# Altium PCB HV_Module.PCBDOC (part 2 of 2)
Units mm, origin at the board's own origin, x right, y up, seen from the top; angles counter-clockwise.
Board outline 118 x 86 mm, 4 copper layers (Top, GP1(GND), L3, Bot), stack 1.648 mm thick; 254 components, 171 nets, 762 pads, 0 vias.
Unrouted connection lines stored in the file: 464.
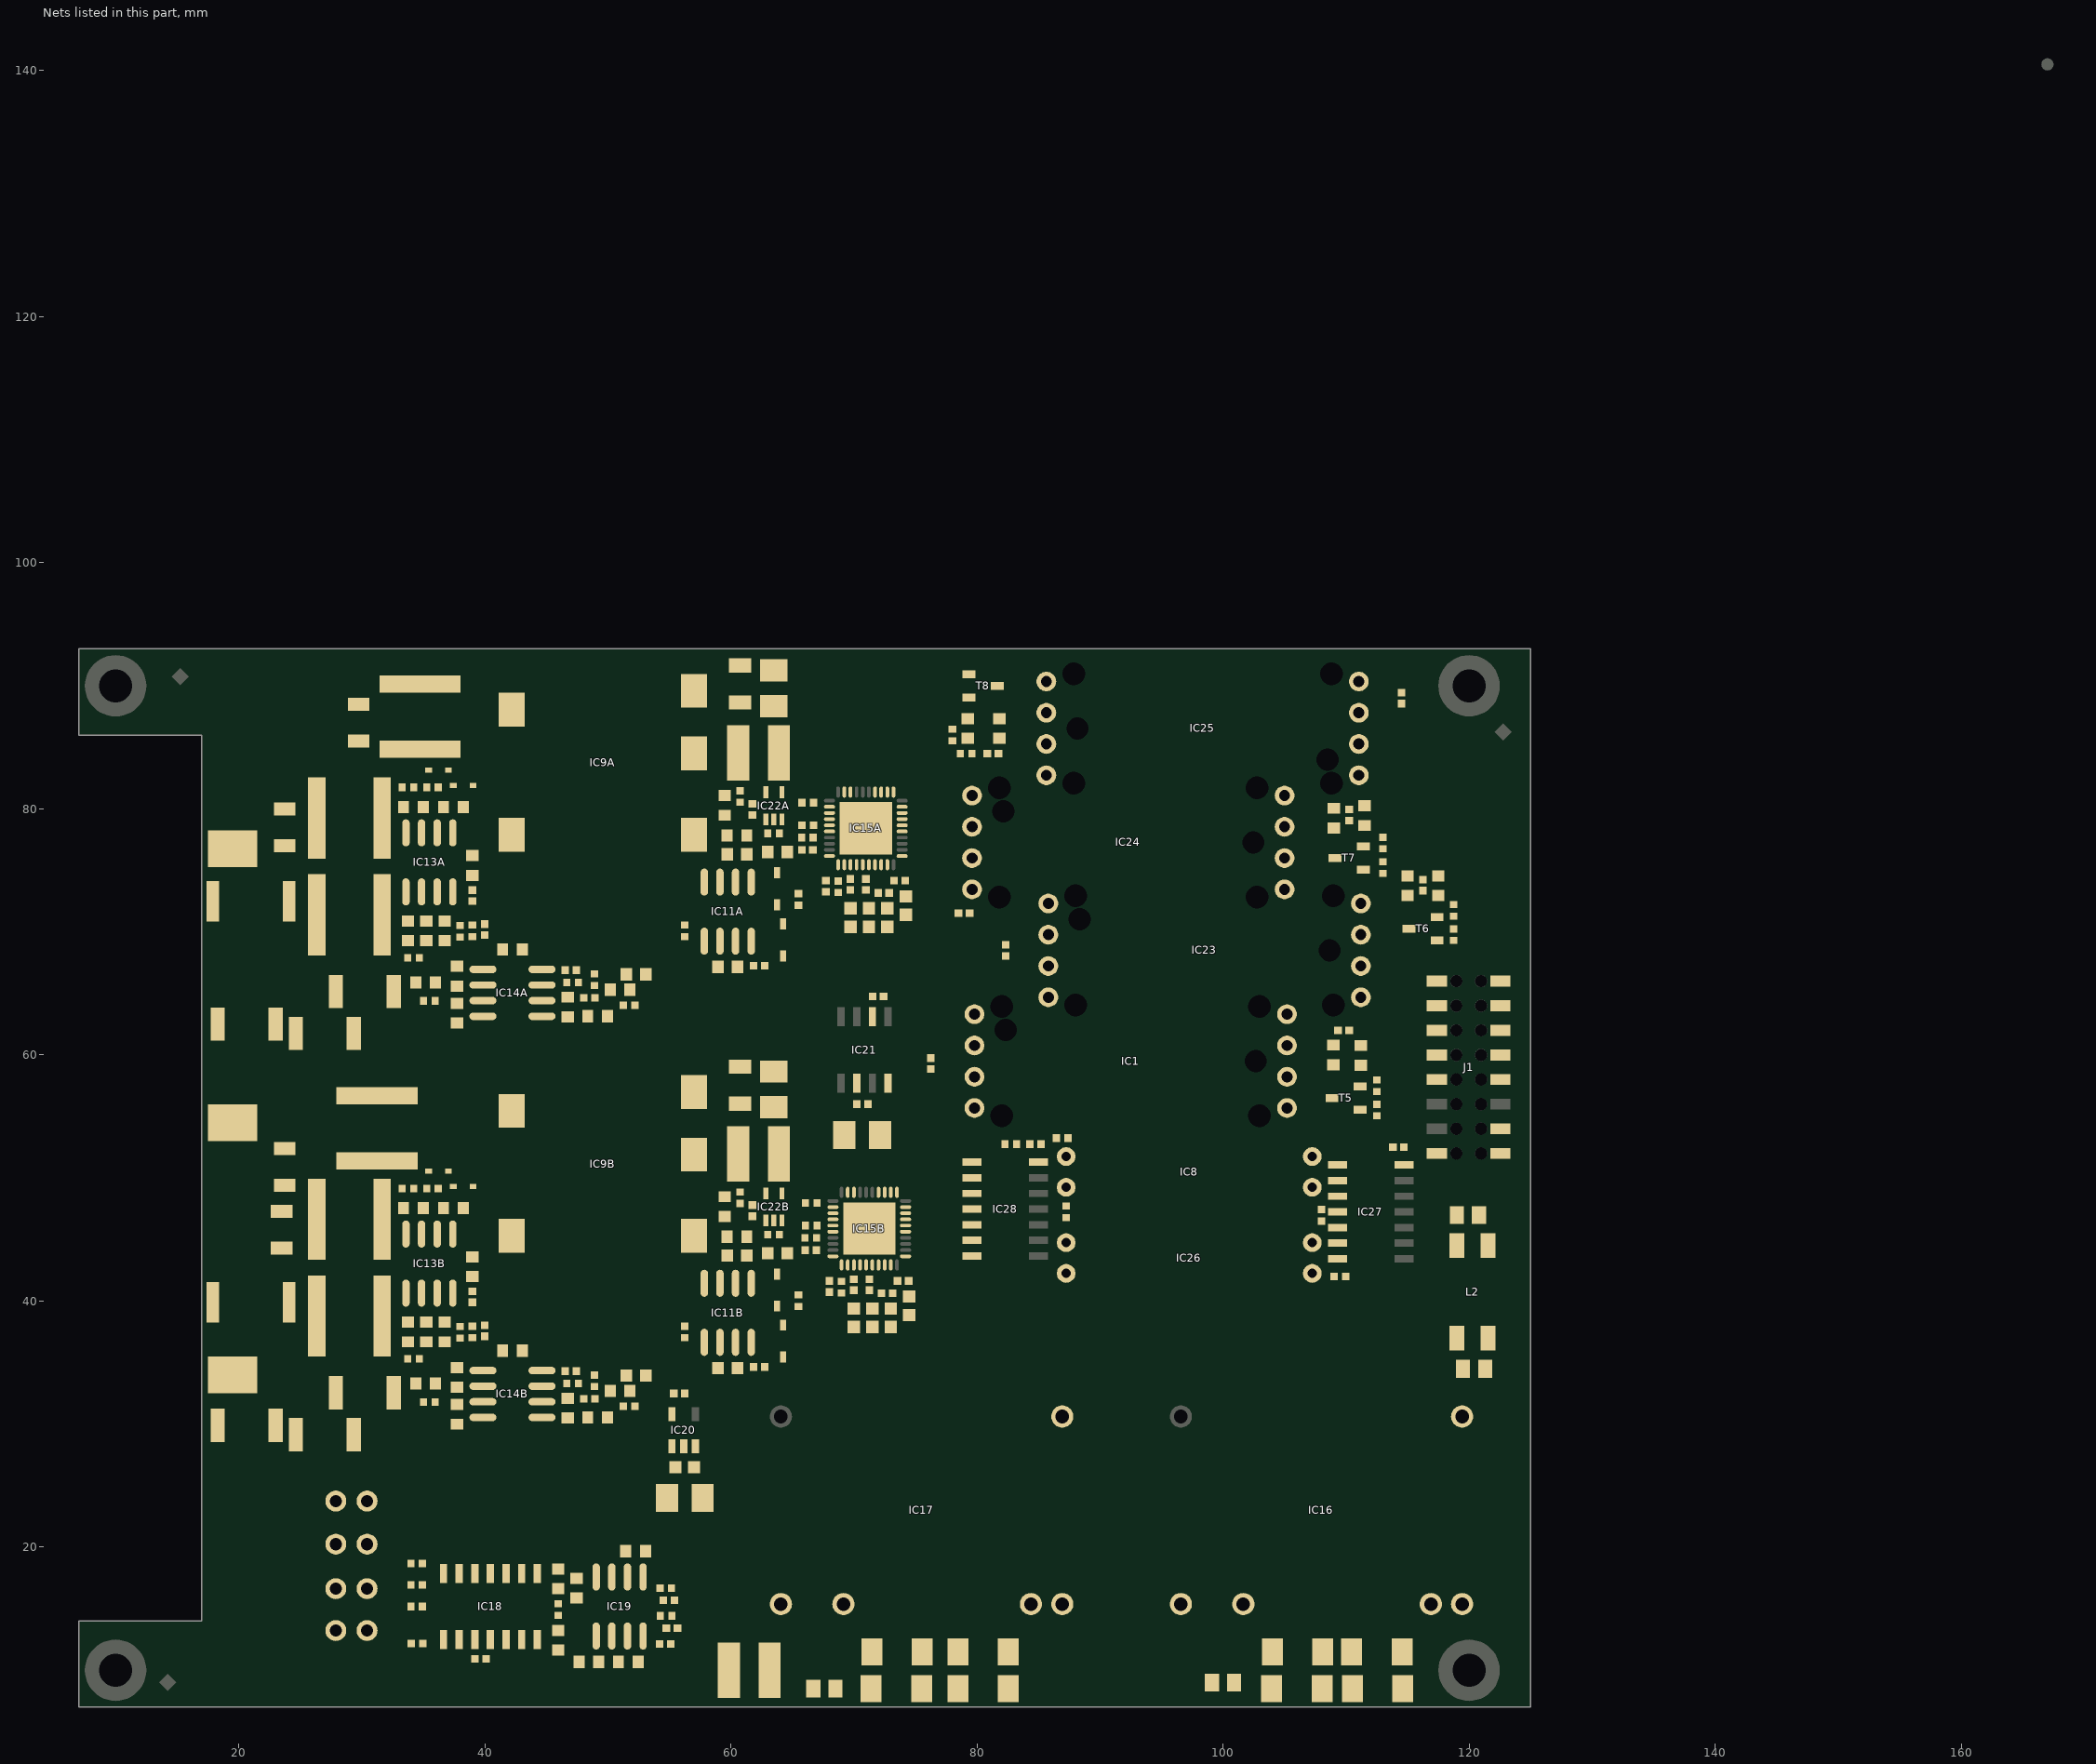
[diagram p3: the nets of this part, all layers, seen from the top]

## Part data
B1 B2 B3 B4: library part PLATED_HOLE2.7_PAD5.0, "Single Terminal Socket", Author="CERN DEM JMW", Component Type="Standard (No BOM)", ComponentHeight=0mm, CreateDate=27.09.2011, Family="Plated Hole", HelpURL=Undefined, LatestRevisionDate=27.09.2011, Mounted=No, PackageDescription="Plated Through Hole: Hole Dia.=2.7mm Pad Dia.=5.0mm", Part Description="Plated Through Hole: Hole Dia.=2.7mm Pad Dia.=5.0mm", Part Number=PLATED_HOLE2.7_PAD5.0, Pin Count=1, Sense=No, SMD=No, Socket=No, Status=None
C1 C2 C3 C5A C5B C6 C7 C12A C12B C13A C13B C44 C46 C49 C50 C51 C52 C57 C61 C62 C63: library part CC0402_1UF_16V_10%_X5R, "Non-polarised capacitor", Case=0402, Manufacturer=GENERIC, Manufacturer1 ComponentHeight=0.55mm, Manufacturer1 Example=TDK, Manufacturer1 Part Number=C1005X5R1C105KT, Tolerance=±10%, Voltage=16V, Author="CERN DEM JLC", Component Type=Standard, CreateDate=2012-10-25, HelpURL=\\cern.ch\dfs\Applications\Altium\Datasheets\CC0402_X5R_TDK_C.pdf, LatestRevisionDate=2012-10-25, Manufacturer Part Number=CC0402_1UF_16V_10%_X5R, Mounted=Yes, Part Description="SMD Multilayer Chip Ceramic Capacitor", Part Number=CC0402_1UF_16V_10%_X5R, Pin Count=2, Sense=No, SMD=Yes, Socket=No, Status=Preferred, TC=X5R
C4A C4B: library part CC1206_22UF_25V_20%_X5R, "Non-polarised capacitor", Case=1206, Manufacturer=GENERIC, Manufacturer1 ComponentHeight=1.8mm, Manufacturer1 Example=TDK, Manufacturer1 Part Number=C3216X5R1E226M160AB, Tolerance=±20%, Voltage=25V, Author="CERN DEM WB", Component Type=Standard, CreateDate=25/07/2018, HelpURL=\\cern.ch\dfs\Applications\Altium\Datasheets\CC1206_X5R_TDK_C.pdf, LatestRevisionDate=25/07/2018, Manufacturer Part Number=CC1206_22UF_25V_20%_X5R, Mounted=Yes, Part Description="SMD Multilayer Chip Ceramic Capacitor", Part Number=CC1206_22UF_25V_20%_X5R, Pin Count=2, Sense=No, SMD=Yes, Socket=No, Status=None, TC=X5R
C11A C11B C16A C16B C23A C23B: library part CC0402_10NF_25V_10%_X7R, "Non-polarised capacitor", Case=0402, Manufacturer=GENERIC, Manufacturer1 ComponentHeight=0.55mm, Manufacturer1 Example=TDK, Manufacturer1 Part Number=C1005X7R1E103K050, Tolerance=±10%, Voltage=25V, Author="CERN DEM JLC", Component Type=Standard, CreateDate=25.10.2012, HelpURL=\\cern.ch\dfs\Applications\Altium\Datasheets\CC0402_X7R_TDK_C.pdf, LatestRevisionDate=25.10.2012, Manufacturer Part Number=CC0402_10NF_25V_10%_X7R, Mounted=Yes, Part Description="SMD Multilayer Chip Ceramic Capacitor", Part Number=CC0402_10NF_25V_10%_X7R, Pin Count=2, Sense=No, SMD=Yes, Socket=No, Status=Preferred, TC=X7R
C14A C14B C15A C15B C17A C17B C19A C19B C47: library part CC0603_10UF_16V_20%_X5R, "Non-polarised capacitor", Case=0603, Manufacturer=GENERIC, Manufacturer1 ComponentHeight=0.8mm, Manufacturer1 Example=MURATA, Manufacturer1 Part Number=GRM188R61C106MA73D, Tolerance=±20%, Voltage=16V, Author="CERN DEM MR", Component Type=Standard, CreateDate=02.03.2016, HelpURL=\\cern.ch\dfs\Applications\Altium\Datasheets\CC0603_X5R_MURATA_GRM.pdf, LatestRevisionDate=02.03.2016, Manufacturer Part Number=CC0603_10UF_16V_20%_X5R, Mounted=Yes, Part Description="SMD Multilayer Chip Ceramic Capacitor", Part Number=CC0603_10UF_16V_20%_X5R, Pin Count=2, Sense=No, SMD=Yes, Socket=No, Status=None, TC=X5R
C18A C18B C24A C24B: library part CC0402_100NF_16V_10%_X5R, "Non-polarised capacitor", Case=0402, Manufacturer=GENERIC, Manufacturer1 ComponentHeight=0.55mm, Manufacturer1 Example=MURATA, Manufacturer1 Part Number=GRM155R61C104KA88D, Tolerance=±10%, Voltage=16V, Author="CERN DEM JLC", Component Type=Standard, CreateDate=10.12.2013, HelpURL=\\cern.ch\dfs\Applications\Altium\Datasheets\CC0402_X5R_MURATA_GRM.pdf, LatestRevisionDate=10.12.2013, Manufacturer Part Number=CC0402_100NF_16V_10%_X5R, Mounted=Yes, Part Description="SMD Multilayer Chip Ceramic Capacitor", Part Number=CC0402_100NF_16V_10%_X5R, Pin Count=2, Sense=No, SMD=Yes, Socket=No, Status=None, TC=X5R
C20A C20B C30A C30B: library part CC0603_220NF_10V_10%_X7R, "Non-polarised capacitor", Case=0603, Manufacturer=GENERIC, Manufacturer1 ComponentHeight=0.9mm, Manufacturer1 Example="YAGEO PHYCOMP", Manufacturer1 Part Number="223824615654 or CC0603KRX7R6BB224", Tolerance=±10%, Voltage=10V, Author="CERN DEM JLC", Component Type=Standard, CreateDate=2012-10-25, HelpURL=\\cern.ch\dfs\Applications\Altium\Datasheets\CC0603_X7R_PHYCOMP.pdf, LatestRevisionDate=2012-10-25, Manufacturer Part Number=CC0603_220NF_10V_10%_X7R, Mounted=Yes, Part Description="SMD Multilayer Chip Ceramic Capacitor", Part Number=CC0603_220NF_10V_10%_X7R, Pin Count=2, Sense=No, SMD=Yes, Socket=No, Status=Preferred, TC=X7R
C21A C21B C22A C22B C29A C29B C48A C48B C54 C55: library part CC0402_100NF_16V_10%_X7R, "Non-polarised capacitor", Case=0402, Manufacturer=GENERIC, Manufacturer1 ComponentHeight=0.55mm, Manufacturer1 Example=MURATA, Manufacturer1 Part Number=GRM155R71C104KA88D, Tolerance=±10%, Voltage=16V, Author="CERN DEM JLC", Component Type=Standard, HelpURL=\\cern.ch\dfs\Applications\Altium\Datasheets\CC0402_X7R_MURATA_GRM.pdf, Manufacturer Part Number=CC0402_100NF_16V_10%_X7R, Mounted=Yes, Part Description="SMD Multilayer Chip Ceramic Capacitor", Part Number=CC0402_100NF_16V_10%_X7R, Pin Count=2, Sense=No, SMD=Yes, Socket=No, Status="Not Recommended", TC=X7R
  C21A C21B C22A C22B: CreateDate=2013-12-05, LatestRevisionDate=2007-12-03
  C29A C29B C48A C48B C54 C55: CreateDate=05.12.2013, LatestRevisionDate=03.12.2007
C25A C25B C27A C27B C28A C28B: library part CC2225_33NF_2KV_10%_X7R, "Non-polarised capacitor", Case=2225, Manufacturer=GENERIC, Manufacturer1 ComponentHeight=2.54mm, Manufacturer1 Example=AVX, Manufacturer1 Part Number=2225GC333KAT1A, Tolerance=±10%, Voltage=2KV, Author="CERN DEM JMW", Component Type=Standard, CreateDate=13.07.2015, HelpURL=\\cern.ch\dfs\Applications\Altium\Datasheets\CC2225_X7R_AVX_HV-MLC.pdf, LatestRevisionDate=13.07.2015, Manufacturer Part Number=CC2225_33NF_2KV_10%_X7R, Mounted=Yes, Part Description="High Voltage MLC Chip Capacitor", Part Number=CC2225_33NF_2KV_10%_X7R, Pin Count=2, Sense=No, SMD=Yes, Socket=No, Status=None, TC=X7R
C26A C26B C53 C56: library part CTE3528-21_22UF_20V_10%, "Polarised capacitor", Case=B, Manufacturer=GENERIC, Manufacturer1 ComponentHeight=2.1mm, Manufacturer1 Example=AVX, Manufacturer1 Part Number=TAJB226K020R, Tolerance=±10%, Voltage=20V, Author="CERN DEM JLC", Component Type=Standard, CreateDate=03/12/2007, HelpURL=\\cern.ch\dfs\Applications\Altium\Datasheets\CTE_AVX_TAJ.pdf, LatestRevisionDate=03/12/2007, Manufacturer Part Number=CTE3528-21_22UF_20V_10%, Mounted=Yes, Part Description="Solid Tantalum Chip Capacitor", Part Number=CTE3528-21_22UF_20V_10%, Pin Count=2, Sense=No, SMD=Yes, Socket=No, Status=Preferred
C31A C31B C45A C45B: library part CC0603_10NF_50V_5%_C0G, "Non-polarised capacitor", Case=0603, Manufacturer=GENERIC, Manufacturer1 ComponentHeight=0.9mm, Manufacturer1 Example=TDK, Manufacturer1 Part Number=C1608C0G1H103J080AA, Tolerance=±5%, Voltage=50V, Author="CERN DEM JLC", Component Type=Standard, CreateDate=2014-12-10, HelpURL=\\cern.ch\dfs\Applications\Altium\Datasheets\CC0603_C0G_TDK_C.pdf, LatestRevisionDate=2014-12-10, Manufacturer Part Number=CC0603_10NF_50V_5%_C0G, Mounted=Yes, Part Description="SMD Multilayer Chip Ceramic Capacitor", Part Number=CC0603_10NF_50V_5%_C0G, Pin Count=2, Sense=No, SMD=Yes, Socket=No, Status=Preferred, TC=C0G/NP0
C32 C33 C34 C35 C40 C41 C42 C43: library part CC1808_330pF_6000V_10%_X7R_VISHAY_HV, "Non-polarised capacitor", Case=1808, Manufacturer=VISHAY, Manufacturer Part Number=HV1808Y331KX6ATHV, Tolerance=±10%, Voltage=6000V, Author="CERN DEM HF", Component Type=Standard, ComponentHeight=2.7mm, CreateDate=11.02.2022, HelpURL=\\cern.ch\dfs\Applications\Altium\Datasheets\CC1812_VISHAY_HV.pdf, LatestRevisionDate=11.02.2022, Mounted=Yes, Part Description="SMD Multilayer Ceramic Chip Capacitor Solutions for High Voltage Applications", Part Number=CC1808_330pF_6000V_10%_X7R_VISHAY_HV, Pin Count=2, Sense=No, SMD=Yes, Socket=No, Status=None, TC=X7R
C36 C37 C38 C39: library part CC0805_4.7UF_50V_10%_X7R, "Non-polarised capacitor", Case=0805, Manufacturer=GENERIC, Manufacturer1 ComponentHeight=1.45mm, Manufacturer1 Example=TDK, Manufacturer1 Part Number=C2012X7R1H475K125, Tolerance=±10%, Voltage=50V, Author="CERN DEM JMW", Component Type=Standard, CreateDate=30.07.2021, HelpURL=\\cern.ch\dfs\Applications\Altium\Datasheets\CC0805_X7R_TDK_C.pdf, LatestRevisionDate=30.07.2021, Manufacturer Part Number=CC0805_4.7UF_50V_10%_X7R, Mounted=Yes, Part Description="SMD Multilayer Chip Ceramic Capacitor", Part Number=CC0805_4.7UF_50V_10%_X7R, Pin Count=2, Sense=No, SMD=Yes, Socket=No, Status=Preferred, TC=X7R
D1A D1B D9A D9B: "Transient Voltage Suppressor Diode (Uni-Directional)", Case=SOD-523, Manufacturer="VISHAY SEMICONDUCTORS", Power=100W, Voltage=1V, Author="CERN DEM BC", Bonding=No, Component Type=Standard, ComponentHeight=0.7mm, CreateDate=19.05.2020, Device=VESD01C1-02VHG3, HelpURL=\\cern.ch\dfs\Applications\Altium\Datasheets\VESD01C1-02VHG3.pdf, LatestRevisionDate=19.05.2020, Manufacturer Part Number=VESD01C1-02VHG3, Mounted=Yes, PackageDescription="SODFL (SOD-523) Diode; 1.20mm W X 0.80mm L X 0.70mm H body, IPC Medium Density", Part Description="Single-Line ESD-Protection (30kV) Diode", Part Number=VESD01C1-02VHG3, Pin Count=2, PressFit=No, Sense=No, SMD=Yes, Socket=No
D3A D3B D8A D8B: "Schottky Diode", Case=SOD-323, Manufacturer=INFINEON, Power=750mA, Voltage=40V, Author="CERN DEM JLC", Bonding=No, Component Type=Standard, ComponentHeight=1.1mm, CreateDate=12.11.2014, Device=BAT165, HelpURL=\\cern.ch\dfs\Applications\Altium\Datasheets\BAT165.pdf, LatestRevisionDate=12.11.2014, Manufacturer Part Number=BAT165, Mounted=Yes, PackageDescription="Small Outline Diode (SOD-323), 1.70mm W X 1.25mm L X 1.10mm H body,  IPC Medium Density", Part Description="Medium Power AF Schottky Diode", Part Number=BAT165, Pin Count=2, PressFit=No, Sense=No, SMD=Yes, Socket=No
FTG1: library part FIDUCIAL_TARGET_C100-200, "Fiducial Target", Author="CERN DEM JLC", Component Type="Standard (No BOM)", ComponentHeight=0mm, CreateDate=09.02.2010, Family=Fiducial, HelpURL=Undefined, LatestRevisionDate=04.04.2012, Mounted=No, PackageDescription="Round Fiducial Target, Top Layer, 1.0mm, Top Solder 2.0mm, Keepout =2.0mm", Part Description="Round Fiducial Target, Top Layer, 1.0mm, Top Solder 2.0mm, Keepout =2.0mm", Part Number=FIDUCIAL_TARGET_C100-200, Pin Count=1, Sense=No, SMD=Yes, Socket=No, Status=None
FTG2 FTG3 FTG4: library part FIDUCIAL_TARGET_S100-200, "Fiducial Target", Author="CERN DEM JLC", Component Type="Standard (No BOM)", ComponentHeight=0mm, CreateDate=09.02.2010, Family=Fiducial, HelpURL=Undefined, LatestRevisionDate=04.04.2012, Mounted=No, PackageDescription="Square Fiducial Target, Top Layer, 1.0mm, Top Solder 2.0mm, Keepout =2.0mm", Part Description="Square Fiducial Target, Top Layer, 1.0mm, Top Solder 2.0mm, Keepout =2.0mm", Part Number=FIDUCIAL_TARGET_S100-200, Pin Count=1, Sense=No, SMD=Yes, Socket=No, Status=None
IC1 IC23 IC24 IC25: "High Voltage Galvanic Insulation Link for DC to 5MBaud", Manufacturer=BROADCOM, Author="CERN DEM HF", Bonding=No, Component Type=Standard, ComponentHeight=6.7mm, CreateDate=10.02.2022, Device=AFBR-390525RZ, HelpURL=\\cern.ch\dfs\Applications\Altium\Datasheets\AFBR-390525RZ.pdf, LatestRevisionDate=10.02.2022, Manufacturer Part Number=AFBR-390525RZ, Mounted=Yes, PackageDescription="BROADCOM AFBR-390525RZ Case, Body 30.46mm L X 10.16mm W X 6.7mm H", Part Description="High Voltage Galvanic Insulation Link for DC to 5MBaud, Length 25mm, 15kV Voltage Supperssion", Part Number=AFBR-390525RZ, Pin Count=8, PressFit=No, Sense=No, SMD=No, Socket=No
IC8 IC26: library part OPTO-OPI1264C, "10kV opto-coupler", Supplier Part Number 1=08F2863, Supplier 1=Newark
IC9A IC9B: "XP POWER, AG Series, DC/HVDC Converter", Manufacturer="XP POWER", Author="CERN DEM BC", Bonding=No, Component Type=Standard, ComponentHeight=3.3mm, CreateDate=18.09.2020, Device=AG20P-5, HelpURL=\\cern.ch\dfs\Applications\Altium\Datasheets\XPPOWER_AG-Series.pdf, LatestRevisionDate=18.09.2020, Manufacturer Part Number=AG20P-5, Mounted=Yes, PackageDescription="AG Series, DC/HVDC Converter, Body W 11.43mm x L 23.37mm x H 6.35mm", Part Description="5VDC to 0-2kVDC, Iout (max) 0.5mA, 1W DC-HVDC Converter", Part Number=AG20P-5, Pin Count=5, PressFit=No, Sense=No, SMD=Yes, Socket=No
IC11A IC11B IC13A IC13B IC14A IC14B IC19: library part CMP-0384-00615-1, "Double Channel Wide Bandwidth Operational Amplifier, 24 MHz BW, 12 V/us SR, Industrial, 8-pin SOIC (R-8), Tube", Amplifiers Per Package=2, Generic Part Number=AD8616, Input Bias Current=200fA, Input Offset Voltage=23uV, Manufacturer="Analog Devices", Code_JEDEC=MS-012-AA, ComponentLink1Description="Manufacturer URL", ComponentLink1URL=http://www.analog.com/en/index.html, ComponentLink2Description=Datasheet, ComponentLink2URL=http://www.analog.com/static/imported-files/data_sheets/AD8615_8616_8618.pdf, ComponentLink3Description="Package Specification", ComponentLink3URL=http://www.analog.com/static/imported-files/packages/PKG_PDF/SOIC_Narrow%20(R)/R_8.pdf, DatasheetVersion="Rev. E", Iq/Amp=2mA, Mounting Technology="Surface Mount", PackageDescription="8-Pin Standard Small Outline Package, Body 3.9 x 4.9 mm, Pitch 1.27 mm", PackageReference=R-8, PackageVersion=060506-A, PartNumber=AD8616AR, Slew Rate=12V/us, Small Signal Bandwidth=24MHz, V Span Max=6V, V Span Min=2.7V
IC15A IC15B: "12-/16-Bit DAS with ADC, DACs, DPIOs, APIOs, Reference, Voltage Monitors, and Temp Sensor", Case=QFN40, Manufacturer=MAXIM, Author="CERN DEM HF", Bonding=No, Component Type=Standard, ComponentHeight=0.8mm, CreateDate=09.02.2022, Device=MAX1329BETL+, HelpURL=\\cern.ch\dfs\Applications\Altium\Datasheets\MAX1329BETL+.pdf, LatestRevisionDate=09.02.2022, Manufacturer Part Number=MAX1329BETL+, Mounted=Yes, PackageDescription="QFN, 0.50mm Pitch, Square; 40 Pin, 6.00mm L X 6.00mm W X 0.80mm H body (w/Thermal Tab 4.25 X 4.25mm), IPC Medium Density", Part Description="12-/16-Bit DAS with ADC, DACs, DPIOs, APIOs, Reference, Voltage Monitors, and Temp Sensor", Part Number=MAX1329BETL+, Pin Count=41, PressFit=No, Sense=No, SMD=Yes, Socket=No
IC16 IC17: "RECOM, RP Series, Single Output DCDC Converter", Manufacturer=RECOM, Author="CERN DEM HF", Bonding=No, Component Type=Standard, ComponentHeight=10.2mm, CreateDate=08.02.2022, HelpURL=\\cern.ch\dfs\Applications\Altium\Datasheets\RECOM_REM5E-XXXXS.pdf, LatestRevisionDate=08.02.2022, Mounted=Yes, PackageDescription="REM5E-XXXXS Series, Body 31.8x20.3mm, DIP-24 Package", Pin Count=6, PressFit=No, Sense=No, SMD=No, Socket=No
  IC16: Device=REM5E-1205S/R10/A, Manufacturer Part Number=REM5E-1205S/R10/A, Part Description="12VDC to +5V (+1A), 5W Regulated DC-DC Converter", Part Number=REM5E-1205S/R10/A
  IC17: Device=REM5E-0505S/R10/A, Manufacturer Part Number=REM5E-0505S/R10/A, Part Description="5VDC to +5V (+1A), 5W Regulated DC-DC Converter", Part Number=REM5E-0505S/R10/A
IC18: "Quad Operational Amplifier", Case=SOIC14, Manufacturer="TEXAS INSTRUMENTS", Author="CERN DEM MR", Bonding=No, Component Type=Standard, ComponentHeight=1.75mm, CreateDate=23.03.2016, Device=LP339M/NOPB, HelpURL=\\cern.ch\dfs\Applications\Altium\Datasheets\LP339M-NOPB.pdf, LatestRevisionDate=23.03.2016, Manufacturer Part Number=LP339M/NOPB, Mounted=Yes, PackageDescription="SOIC 14, Pitch 1.27mm - Body 4x8.75mm, IPC Medium Density", Part Description="Ultra-Low Power Quad Comparator", Part Number=LP339M/NOPB, Pin Count=14, PressFit=No, Sense=No, SMD=Yes, Socket=No
IC20: "3.3V 300mA, Ultra-Low Quiescent Current, IQ 12uA, Ultra-Low Noise, LDO Voltage Regulator", Case=SOT23-5, Manufacturer="ON SEMICONDUCTOR", Author="CERN DEM JLC", Bonding=No, Component Type=Standard, ComponentHeight=1.1mm, CreateDate=16.02.2017, Device=NCP703SN33T1G, HelpURL=\\cern.ch\dfs\Applications\Altium\Datasheets\NCP703SN33T1G.pdf, LatestRevisionDate=16.02.2017, Manufacturer Part Number=NCP703SN33T1G, Mounted=Yes, PackageDescription="SOT, 0.95mm Pitch; 5 Pin, 1.50mm W X 3.00mm L X 1.10mm H Body, IPC Medium Density", Part Description="3.3V 300mA, Ultra-Low Quiescent Current, IQ 12uA, Ultra-Low Noise, LDO Voltage Regulator", Part Number=NCP703SN33T1G, Pin Count=5, PressFit=No, Sense=No, SMD=Yes, Socket=No
IC21: "2.5V ±0.12% 10ppm/°C Ultralow Noise XFET Voltage References with Current Sink and Source Capability", Case=SOIC8, Manufacturer="ANALOG DEVICES", Author="CERN DEM JLC", Bonding=No, Component Type=Standard, ComponentHeight=1.75mm, CreateDate=26.08.2013, Device=ADR431ARZ, HelpURL=\\cern.ch\dfs\Applications\Altium\Datasheets\ADR431ARZ.pdf, LatestRevisionDate=26.08.2013, Manufacturer Part Number=ADR431ARZ, Mounted=Yes, PackageDescription="SOIC 8, Pitch 1.27mm, Body 4x5mm, IPC Medium Density", Part Description="2.5V Output,  3mV ±0.12% Accuracy, 10ppm/°C Ultralow Noise XFET Voltage References with Current Sink and Source Capability", Part Number=ADR431ARZ, Pin Count=6, PressFit=No, Sense=No, SMD=Yes, Socket=No
IC22A IC22B: "Single Bus Buffer Gate With 3-State Output", Case=SOT353, Manufacturer=NEXPERIA, Author="CERN DEM JMW", Bonding=No, Component Type=Standard, ComponentHeight=1.1mm, CreateDate=06.08.2020, Device=74HCT1G125GW, HelpURL=\\cern.ch\dfs\Applications\Altium\Datasheets\74HCT1G125GW.pdf, LatestRevisionDate=06.08.2020, Manufacturer Part Number=74HCT1G125GW, Mounted=Yes, PackageDescription="SOT353, SC70-5, 0.65mm Pitch; 5 Pin, 1.25mm W X 2.00mm L X 1.10mm H body, IPC Medium Density", Part Description="Bus Buffer/Line Driver 3-State", Part Number=74HCT1G125GW, Pin Count=5, PressFit=No, Sense=No, SMD=Yes, Socket=No
IC27 IC28: "Hex Schmitt-Trigger Inverter", Case=SOIC14, Manufacturer="TEXAS INSTRUMENTS", Author="CERN DEM JMW", Bonding=No, Component Type=Standard, ComponentHeight=1.75mm, CreateDate=29.09.2008, Device=SN74LVC14AD, HelpURL=\\cern.ch\dfs\Applications\Altium\Datasheets\SN74LVC14AD.pdf, LatestRevisionDate=29.09.2008, Manufacturer Part Number=SN74LVC14AD, Mounted=Yes, PackageDescription="SOIC 14, Pitch 1.27mm - Body 4x8.75mm, IPC Medium Density", Part Description="Hex Schmitt-Trigger Inverter", Part Number=SN74LVC14AD, Pin Count=14, PressFit=No, Sense=No, SMD=Yes, Socket=No
J1: library part 62131621821, "Socket Header WR-PHD, Pitch 2.00 mm, SMT, Vertical, dual row, 16 pin", Contact Resistance="20 mOhm", Insulation Resistance=">1000 MOhm", Operating Temperature="-40 to 105 degC", Rated Current="2 A", Working Voltage="200 VAC", ComponentLink1Description=Manufacturer, ComponentLink1URL=http://www.we-online.de, ComponentLink2Description=Datasheet, ComponentLink2URL=http://katalog.we-online.com/em/datasheet/62131621821.pdf, Mounting Technology=SMT, Orientation=Vertical, Part Number=62131621821, Pin Number=16, Pitch="2.00 mm", Published Date="Jan. 2018", Publisher="Wurth Elektronik", Row Number=dual
J3 J4 J7: library part SMD_PAD_4X3MM, "Single SMD Pad", Author="CERN DEM JLC", Component Type="Standard (No BOM)", ComponentHeight=0mm, CreateDate=15.03.2010, Family="SMD Pad", HelpURL=Undefined, LatestRevisionDate=15.03.2010, Mounted=No, PackageDescription="4mm x  3mm SMD Pad", Part Description="4mm x 3mm SMD Pad", Part Number=SMD_PAD_4X3MM, Pin Count=1, Sense=No, SMD=No, Socket=No, Status=None
L1A L1B L3: library part IND_10UH_20%_BOURNS_PM43, "Inductor With Core", Manufacturer=BOURNS, Manufacturer Part Number=PM43-100M-RC, Power=1.15A, Resistance=0.18R, Tolerance=±20%, Author="CERN DEM JLC", Component Type=Standard, ComponentHeight=3.5mm, CreateDate=17/05/2011, HelpURL=\\cern.ch\dfs\Applications\Altium\Datasheets\IND_BOURNS_PM43.pdf, LatestRevisionDate=17/05/2011, Mounted=Yes, Part Description="SMD Power Inductor", Part Number=IND_10UH_20%_BOURNS_PM43, Pin Count=2, Sense=No, SMD=Yes, Socket=No, Status=None
L2: library part IND_250UH_50%_WURTH_WE-SL2-744224, "Inductor Common Mode", Manufacturer="WURTH ELEKTRONIK", Manufacturer Part Number=744224, Power=1.2A, Resistance=0.13R, Tolerance=±50%, Author="CERN DEM JLC", Component Type=Standard, ComponentHeight=5.3mm, CreateDate=02.12.2009, HelpURL=\\cern.ch\dfs\Applications\Altium\Datasheets\IND_WURTH_WE-SL2_744224.pdf, LatestRevisionDate=15.10.2012, Mounted=Yes, Part Description="Common Mode SMD Line Filter (WE-SL2 Series)", Part Number=IND_250UH_50%_WURTH_WE-SL2-744224, Pin Count=4, Sense=No, SMD=Yes, Socket=No
LD1 LD3: library part LED_DIALIGHT_555-2301F, "LED Green 1C 2A", Manufacturer=DIALIGHT, Manufacturer Part Number=555-2301F, Author="CERN DEM JMW", Bonding=No, Color=Green, Component Type=Standard, ComponentHeight=6.35mm, CreateDate=22.09.2008, HelpURL=\\cern.ch\dfs\Applications\Altium\Datasheets\LED_DIALIGHT_555-2301F.pdf, LatestRevisionDate=17.03.2010, Mounted=Yes, PackageDescription="Single 2mm Green LED, Body 5.08x2.54mm, Pin spacing 2.54mm", Part Description="Single 2mm Green LED CBI® Circuit Board Indicator", Part Number=LED_DIALIGHT_555-2301F, Pin Count=2, PressFit=No, Sense=No, SMD=No, Socket=No
LD2 LD4: library part LED_DIALIGHT_555-2001F, "LED Red 1C 2A", Manufacturer=DIALIGHT, Manufacturer Part Number=555-2001F, Author="CERN DEM JMW", Bonding=No, Color=Red, Component Type=Standard, ComponentHeight=6.35mm, CreateDate=22.09.2008, HelpURL=\\cern.ch\dfs\Applications\Altium\Datasheets\LED_DIALIGHT_555-2001F.pdf, LatestRevisionDate=17.03.2010, Mounted=Yes, PackageDescription="Single 2mm Red LED, Body 5.08x2.54mm, Pin spacing 2.54mm", Part Description="Single 2mm Red LED CBI® Circuit Board Indicator", Part Number=LED_DIALIGHT_555-2001F, Pin Count=2, PressFit=No, Sense=No, SMD=No, Socket=No
LP1 LP2 LP3 LP4: library part LEDLP_BIVAR_PLP2-1200, "LED Light Pipe x1 Type1", Manufacturer=BIVAR, Manufacturer Part Number=PLP2-1200, Author="CERN DEM HF", Bonding=No, Component Type=Standard, ComponentHeight=31.3mm, CreateDate=09.02.2022, HelpURL=\\cern.ch\dfs\Applications\Altium\Datasheets\LEDLP_BIVAR_PLP2-1200.pdf, LatestRevisionDate=09.02.2022, Mounted=Yes, PackageDescription="3mm Dome Leens, Single Station Vertivcal Round Lightpipe Height 1.2 in. (30.5mm)", Part Description="3mm Dome Leens, Single Station Vertivcal Round Lightpipe Height 1.2 in. (30.5mm)", Part Number=LEDLP_BIVAR_PLP2-1200, Pin Count=0, PressFit=No, Sense=No, SMD=No, Socket=No
R1 R6 R98 R102: library part R0603_390R_1%_0.1W_100PPM, "Resistor - 1%", Case=0603, Manufacturer=GENERIC, Manufacturer1 ComponentHeight=0.55mm, Manufacturer1 Example="NIC COMPONENT", Manufacturer1 Part Number=NRC06F3900TRF, Power=0.1W, Tolerance=±1%, Author="CERN DEM JLC", Component Type=Standard, CreateDate=03.12.2007, HelpURL=\\cern.ch\dfs\Applications\Altium\Datasheets\R0603_NIC_NRC.pdf, LatestRevisionDate=13.03.2008, Manufacturer Part Number=R0603_390R_1%_0.1W_100PPM, Mounted=Yes, Part Description="General Purpose Thick Film Chip Resistor", Part Number=R0603_390R_1%_0.1W_100PPM, Pin Count=2, PressFit=No, Sense=No, SMD=Yes, Socket=No, Status=Preferred, TC=±100ppm/°C
R2 R95 R99 R103: library part R0402_47R_1%_0.0625W_100PPM, "Resistor - 1%", Case=0402, Manufacturer=GENERIC, Manufacturer1 ComponentHeight=0.4mm, Manufacturer1 Example="YAGEO PHYCOMP", Manufacturer1 Part Number=232270674709L, Power=0.0625W, Tolerance=±1%, Author="CERN DEM JLC", Component Type=Standard, CreateDate=03.12.2007, HelpURL=\\cern.ch\dfs\Applications\Altium\Datasheets\R0402_Phycomp_RC0402.pdf, LatestRevisionDate=17.10.2012, Manufacturer Part Number=R0402_47R_1%_0.0625W_100PPM, Mounted=Yes, Part Description="General Purpose Thick Film Chip Resistor", Part Number=R0402_47R_1%_0.0625W_100PPM, Pin Count=2, PressFit=No, Sense=No, SMD=Yes, Socket=No, Status="Not Recommended", TC=±100ppm/°C
R3 R57 R58A R58B R63A R63B R67 R70 R71 R72 R76A R76B R78A R78B R82A R82B R84A R84B R89A R89B R91A R91B R94A R94B R96 R100 R104 R109: library part R0402_1K_1%_0.0625W_100PPM, "Resistor - 1%", Case=0402, Manufacturer=GENERIC, Manufacturer1 ComponentHeight=0.4mm, Manufacturer1 Example="YAGEO PHYCOMP", Manufacturer1 Part Number=232270671002L, Power=0.0625W, Tolerance=±1%, Author="CERN DEM JLC", Component Type=Standard, HelpURL=\\cern.ch\dfs\Applications\Altium\Datasheets\R0402_Phycomp_RC0402.pdf, Manufacturer Part Number=R0402_1K_1%_0.0625W_100PPM, Mounted=Yes, Part Description="General Purpose Thick Film Chip Resistor", Part Number=R0402_1K_1%_0.0625W_100PPM, Pin Count=2, Sense=No, SMD=Yes, Socket=No, TC=±100ppm/°C
  R3 R96 R100 R104: CreateDate=03.12.2007, LatestRevisionDate=17.10.2012, PressFit=No, Status="Not Recommended"
  R57 R58A R58B R63A R63B R67 R70 R71 R72 R76A R76B R78A R78B R82A R82B R84A R84B R89A R89B R91A R91B R94A R94B R109: CreateDate=2007-12-03, LatestRevisionDate=2012-10-17, Status="Not recommended"
R4 R97 R101 R105: library part R0603_150R_1%_0.1W_100PPM, "Resistor - 1%", Case=0603, Manufacturer=GENERIC, Manufacturer1 ComponentHeight=0.55mm, Manufacturer1 Example="NIC COMPONENT", Manufacturer1 Part Number=NRC06F1500TRF, Power=0.1W, Tolerance=±1%, Author="CERN DEM JLC", Component Type=Standard, CreateDate=03.12.2007, HelpURL=\\cern.ch\dfs\Applications\Altium\Datasheets\R0603_NIC_NRC.pdf, LatestRevisionDate=13.03.2008, Manufacturer Part Number=R0603_150R_1%_0.1W_100PPM, Mounted=Yes, Part Description="General Purpose Thick Film Chip Resistor", Part Number=R0603_150R_1%_0.1W_100PPM, Pin Count=2, PressFit=No, Sense=No, SMD=Yes, Socket=No, Status=Preferred, TC=±100ppm/°C
R5 R56 R59 R66 R68 R69 R77A R77B R87A R87B: library part R0603_100K_1%_0.1W_100PPM, "Resistor - 1%", Case=0603, Manufacturer=GENERIC, Manufacturer1 ComponentHeight=0.55mm, Manufacturer1 Example="NIC COMPONENT", Manufacturer1 Part Number=NRC06F1003TRF, Power=0.1W, Tolerance=±1%, Author="CERN DEM JLC", Component Type=Standard, CreateDate=2007-12-03, HelpURL=\\cern.ch\dfs\Applications\Altium\Datasheets\R0603_NIC_NRC.pdf, LatestRevisionDate=2008-03-13, Manufacturer Part Number=R0603_100K_1%_0.1W_100PPM, Mounted=Yes, Part Description="General Purpose Thick Film Chip Resistor", Part Number=R0603_100K_1%_0.1W_100PPM, Pin Count=2, Sense=No, SMD=Yes, Socket=No, Status=Preferred, TC=±100ppm/°C
R20A R20B R22A R22B R25A R25B R27A R27B R80A R80B: library part R0402_0R_JUMPER, "Resistor", Case=0402, Manufacturer=GENERIC, Manufacturer1 ComponentHeight=0.4mm, Manufacturer1 Example="YAGEO PHYCOMP", Manufacturer1 Part Number=232270591001L, Author="CERN DEM JLC", Component Type=Standard, CreateDate=03.12.2007, HelpURL=\\cern.ch\dfs\Applications\Altium\Datasheets\R0402_Phycomp_RC0402.pdf, LatestRevisionDate=17.10.2012, Manufacturer Part Number=R0402_0R_JUMPER, Mounted=Yes, Part Description="1A (0.05R Max DC Resistance) Zero Ohm Jumper", Part Number=R0402_0R_JUMPER, Pin Count=2, PressFit=No, Sense=No, SMD=Yes, Socket=No, Status="Not Recommended"
R21 R23 R24 R106: library part R0402_330R_1%_0.0625W_100PPM, "Resistor - 1%", Case=0402, Manufacturer=GENERIC, Manufacturer1 ComponentHeight=0.4mm, Manufacturer1 Example="YAGEO PHYCOMP", Manufacturer1 Part Number=232270673301L, Power=0.0625W, Tolerance=±1%, Author="CERN DEM JLC", Component Type=Standard, CreateDate=2007-12-03, HelpURL=\\cern.ch\dfs\Applications\Altium\Datasheets\R0402_Phycomp_RC0402.pdf, LatestRevisionDate=2012-10-17, Manufacturer Part Number=R0402_330R_1%_0.0625W_100PPM, Mounted=Yes, Part Description="General Purpose Thick Film Chip Resistor", Part Number=R0402_330R_1%_0.0625W_100PPM, Pin Count=2, Sense=No, SMD=Yes, Socket=No, Status="Not recommended", TC=±100ppm/°C
R26A R26B R28A R28B R30A R30B R49A R49B R79A R79B R83A R83B R85A R85B R88A R88B R92A R92B: library part R0603_10K_0.1%_0.063W_10PPM, "Resistor - 0.1%", Case=0603, Manufacturer=GENERIC, Manufacturer1 ComponentHeight=0.5mm, Manufacturer1 Example="TYCO HOLSWORTHY", Manufacturer1 Part Number=RN73C1J10KBTDF, Power=0.063W, Tolerance=±0.1%, Author="CERN DEM JLC", Component Type=Standard, CreateDate=03.12.2007, HelpURL=\\cern.ch\dfs\Applications\Altium\Datasheets\R0603_Tyco_RN73.pdf, LatestRevisionDate=13.03.2008, Manufacturer Part Number=R0603_10K_0.1%_0.063W_10PPM, Mounted=Yes, Part Description="Thin Film Chip Resistor", Part Number=R0603_10K_0.1%_0.063W_10PPM, Pin Count=2, PressFit=No, Sense=No, SMD=Yes, Socket=No, Status="Not Recommended", TC=±10ppm
R29A R29B R32A R32B: library part R1206_100K_0.1%_0.4W_25PPM_VISHAY_PAT, "Resistor - 0.1%", Case=1206, Manufacturer="VISHAY DALE THIN FILM", Manufacturer Part Number=PAT1206E1003BS, Power=0.4W, Tolerance=±0.1%, Author="CERN DEM MR", Component Type=Standard, ComponentHeight=0.5mm, CreateDate=19.07.2016, HelpURL=\\cern.ch\dfs\Applications\Altium\Datasheets\R1206_VISHAY_PAT.pdf, LatestRevisionDate=19.07.2016, Mounted=Yes, Part Description="Precision Automotive Thin Film Chip Resistors 2kV ESD Rating", Part Number=R1206_100K_0.1%_0.4W_25PPM_VISHAY_PAT, Pin Count=2, PressFit=No, Sense=No, SMD=Yes, Socket=No, Status=None, TC=±25ppm/°C
R33A R33B: library part R0603_15K_0.1%_0.063W_10PPM, "Resistor - 0.1%", Case=0603, Manufacturer=GENERIC, Manufacturer1 ComponentHeight=0.5mm, Manufacturer1 Example="TYCO HOLSWORTHY", Manufacturer1 Part Number=RN73C1J15KBTDF, Power=0.063W, Tolerance=±0.1%, Author="CERN DEM JLC", Component Type=Standard, CreateDate=03.12.2007, HelpURL=\\cern.ch\dfs\Applications\Altium\Datasheets\R0603_Tyco_RN73.pdf, LatestRevisionDate=13.03.2008, Manufacturer Part Number=R0603_15K_0.1%_0.063W_10PPM, Mounted=Yes, Part Description="Thin Film Chip Resistor", Part Number=R0603_15K_0.1%_0.063W_10PPM, Pin Count=2, PressFit=No, Sense=No, SMD=Yes, Socket=No, Status="Not Recommended", TC=±10ppm
R60A R60B R61A R61B R81A R81B: library part R1210_1M0_0.1%_1W_25ppm_HVCB2010BDE10M0, "RES, HV, 2010, 10 Mohm, 0.1%, 25 ppm, 1W", Case=2010, Manufacturer="Stackpole Electronics", Manufacturer1 ComponentHeight=0.65mm, Manufacturer Part Number=HVCB2010BDE10M0, Power=1W, Tolerance=±0.1%, Author=GK, Component Type=Standard, CreateDate=26.02.2015, HelpURL=\\cern.ch\dfs\Applications\Altium\Datasheets\R2010_WELWYN_LHVC.pdf, LatestRevisionDate=26.02.2015, Mounted=Yes, Part Description="Thick Film Chip Resistor", Part Number=R1210_1M0_0.1%_1W_25ppm_HVCB2010BDE10M0, Pin Count=2, PressFit=No, Sense=No, SMD=Yes, Socket=No, Status=None, TC=±25ppm/°C
R62A R62B R75A R75B R93A R93B R107 R108: library part R0402_10K_1%_0.0625W_100PPM, "Resistor - 1%", Case=0402, Manufacturer=GENERIC, Manufacturer1 ComponentHeight=0.4mm, Manufacturer1 Example="YAGEO PHYCOMP", Manufacturer1 Part Number=232270671003L, Power=0.0625W, Tolerance=±1%, Author="CERN DEM JLC", Component Type=Standard, HelpURL=\\cern.ch\dfs\Applications\Altium\Datasheets\R0402_Phycomp_RC0402.pdf, Manufacturer Part Number=R0402_10K_1%_0.0625W_100PPM, Mounted=Yes, Part Description="General Purpose Thick Film Chip Resistor", Part Number=R0402_10K_1%_0.0625W_100PPM, Pin Count=2, Sense=No, SMD=Yes, Socket=No, TC=±100ppm/°C
  R62A R62B R93A R93B: CreateDate=03.12.2007, LatestRevisionDate=17.10.2012, PressFit=No, Status="Not Recommended"
  R75A R75B R107 R108: CreateDate=2007-12-03, LatestRevisionDate=2012-10-17, Status="Not recommended"
R73A R73B: library part "R2512_100R_1%_1.5W_100PPM_VISHAY_CRCW-HP e3", "Resistor - 1%", Case=2512, Manufacturer="VISHAY DRALORIC", Manufacturer Part Number=CRCW2512100RFKEHHP, Power=1.5W, Tolerance=±1%, Voltage=500V, Author="CERN DEM JLC", Component Type=Standard, ComponentHeight=0.7mm, CreateDate=2013-05-21, HelpURL="\\cern.ch\dfs\Applications\Altium\Datasheets\R2512_VISHAY_CRCW-HP e3.pdf", LatestRevisionDate=2013-05-21, Mounted=Yes, Part Description="Pulse Proof, High Power Thick Film Chip Resistor", Part Number="R2512_100R_1%_1.5W_100PPM_VISHAY_CRCW-HP e3", Pin Count=2, Sense=No, SMD=Yes, Socket=No, Status=None, TC=±100ppm/°C
R74A R74B: library part R0603_1K_1%_0.1W_100PPM, "Resistor - 1%", Case=0603, Manufacturer=GENERIC, Manufacturer1 ComponentHeight=0.55mm, Manufacturer1 Example="NIC COMPONENT", Manufacturer1 Part Number=NRC06F1001TRF, Power=0.1W, Tolerance=±1%, Author="CERN DEM JLC", Component Type=Standard, CreateDate=03/12/2007, HelpURL=\\cern.ch\dfs\Applications\Altium\Datasheets\R0603_NIC_NRC.pdf, LatestRevisionDate=13/03/2008, Manufacturer Part Number=R0603_1K_1%_0.1W_100PPM, Mounted=Yes, Part Description="General Purpose Thick Film Chip Resistor", Part Number=R0603_1K_1%_0.1W_100PPM, Pin Count=2, PressFit=No, Sense=No, SMD=Yes, Socket=No, Status=Preferred, TC=±100ppm/°C
R86A R86B R90A R90B: library part R0603_240K_0.1%_0.063W_10PPM, "Resistor - 0.1%", Case=0603, Manufacturer=GENERIC, Manufacturer1 ComponentHeight=0.5mm, Manufacturer1 Example="TYCO HOLSWORTHY", Manufacturer1 Part Number=RN73C1J241KBTDF, Power=0.063W, Tolerance=±0.1%, Author="CERN DEM BC", Component Type=Standard, CreateDate=28.10.2021, HelpURL=\\cern.ch\dfs\Applications\Altium\Datasheets\R0603_Tyco_RN73.pdf, LatestRevisionDate=28.10.2021, Manufacturer Part Number=R0603_240K_0.1%_0.063W_10PPM, Mounted=Yes, Part Description="Thin Film Chip Resistor", Part Number=R0603_240K_0.1%_0.063W_10PPM, Pin Count=2, PressFit=No, Sense=No, SMD=Yes, Socket=No, Status="Not Recommended", TC=±10ppm
T5 T6 T7 T8: "N-CHANNEL MOSFET WITH DIODE", Case=SOT23-3, Manufacturer="FAIRCHILD SEMICONDUCTOR", Author="CERN DEM JLC", Bonding=No, Component Type=Standard, ComponentHeight=1.3mm, CreateDate=20.08.2008, Device=2N7002, HelpURL=\\cern.ch\dfs\Applications\Altium\Datasheets\2N7002.pdf, LatestRevisionDate=07.04.2009, Manufacturer Part Number=2N7002, Mounted=Yes, PackageDescription="SOT23, 0.95mm Pitch; 3 Pin, 1.30mm W X 2.90mm L X 1.30mm H body, IPC Medium Density", Part Description="60V, 280mA, N-Channel Enhancement Mode Field Effect Transistor (FET)", Part Number=2N7002, Pin Count=3, PressFit=No, Sense=No, SMD=Yes, Socket=No

## Nets (pads, with @x,y where several pads share a name; then routed paths per layer and width w, separated by ;. In a path a pad name is that pad's centre, name@x,y a point inside that pad or via, vN(x,y) a via of type N, cw(c..) or ccw(c..) an arc to the next point about the centre after c; other vN are vias at no path point)
ADC_IA: C23A.2 IC15A.30 R94A.1
ADC_IB: C23B.2 IC15B.30 R94B.1
CSN: J1.5 R99.2
CSN_ISOL: IC15A.8 IC24.8
CSN_ISOLB: IC15A.14 IC15B.8
DAC_IA: IC15A.23 R27A.2 R58A.2
DAC_IB: IC15B.23 R27B.2 R58B.2
DAC_UA: IC15A.24 R25A.2 R82A.2
DAC_UB: IC15B.24 R25B.2 R82B.2
ENBLA: IC22A.2 IC22B.2 IC28.2
ENBLn1: IC15A.1 IC22A.1 R75A.1
ENBLn2: IC15B.1 IC22B.1 R75B.1
EXT_CSN_ISOLB: IC15B.14
EXT_SCKI_ISOLA: IC15A.13 IC15B.6
EXT_SCKI_ISOLB: IC15B.13
EXT_SDI_ISOLA: IC15A.12 IC15B.7
EXT_SDI_ISOLB: IC15B.12
EXT_SDO_ISOLA: IC15A.11 IC15B.5
EXT_SDO_ISOLB: IC15B.11
GND: C1.1 C6.1 C36.1 C49.2 C61.1 C63.2 IC1.2 IC1.3 IC1.4 IC23.2 IC23.3 IC23.4 IC24.2 IC24.3 IC24.4 IC25.5 IC25.7 IC26.2 IC27.7 J1.2 J1.4 J1.14 J1.16 L2.2 R3.1 R4.1 R24.1 R96.1 R97.1 R100.1 R101.1
GNDp: C2.2 C3.2 C4A.1 C4B.1 C5A.1 C5B.1 C7.2 C11A.1 C11B.1 C12A.1 C12B.1 C14A.1 C14B.1 C15A.1 C15B.1 C16A.1 C16B.1 C17A.1 C17B.1 C18A.1 C18B.1 C19A.1 C19B.1 C21A.1 C21B.1 C22A.1 C22B.1 C23A.1 C23B.1 C24A.1 C24B.1 C26A.2 C26B.2 C29A.1 C29B.1 C39.1 C43.2 C47.1 C48A.1 C48B.1 C50.2 C51.1 C52.1 C53.2 C54.1 C55.1 C56.2 C57.1 C62.1 D9A.1 D9B.1 IC1.5 IC1.7 IC8.2 IC9A.1 IC9B.1 IC11A.4 IC11B.4 IC13A.4 IC13B.4 IC14A.4 IC14B.4 IC15A.18 IC15A.19 IC15A.34 IC15A.39 IC15A.41 IC15B.18 IC15B.19 IC15B.34 IC15B.39 IC15B.41 IC17.16 IC18.12 IC19.4 IC20.2 IC21.4 IC22A.3 IC22B.3 IC23.5 IC23.7 IC24.5 IC24.7 IC25.2 IC25.3 IC25.4 IC28.7 J3.1 R21.1 R28A.2 R28B.2 R59.1 R68.1 R83A.1 R83B.1 R92A.1 R92B.1 R93A.1 R93B.1 R104.1 R105.1
HV_EN: IC27.1 J1.15
HV_OUTA: J7.1 R61A.2 R73A.2
HV_OUTB: J4.1 R61B.2 R73B.2
INT0: IC28.6 J1.9
INT0_ISOL: IC15A.9 IC15B.9 IC27.3 R107.1
NetC4A_2: C4A.2 C26A.1 IC9A.2 L1A.2
NetC4B_2: C4B.2 C26B.1 IC9B.2 L1B.2
NetC5A_2: C5A.2 IC15A.26 R22A.1
NetC5B_2: C5B.2 IC15B.26 R22B.1
NetC11A_2: C11A.2 IC15A.33
NetC11B_2: C11B.2 IC15B.33
NetC12A_2: C12A.2 IC15A.32 R20A.1
NetC12B_2: C12B.2 IC15B.32 R20B.1
NetC13A_1: C13A.1 IC15A.36
NetC13A_2: C13A.2 IC15A.37
NetC13B_1: C13B.1 IC15B.36
NetC13B_2: C13B.2 IC15B.37
NetC14A_2: C14A.2 C15A.2 C17A.2 C18A.2 IC15A.35
NetC14B_2: C14B.2 C15B.2 C17B.2 C18B.2 IC15B.35
NetC20A_1: C20A.1 C45A.1 D8A.1 IC11A.7
NetC20A_2: C20A.2 R87A.1
NetC20B_1: C20B.1 C45B.1 D8B.1 IC11B.7
NetC20B_2: C20B.2 R87B.1
NetC25A_1: C25A.1 C27A.1 C28A.1 D1A.1 IC9A.4 R63A.2 R89A.2
NetC25A_2: C25A.2 IC9A.3 R29A.1
NetC25B_1: C25B.1 C27B.1 C28B.1 D1B.1 IC9B.4 R63B.2 R89B.2
NetC25B_2: C25B.2 IC9B.3 R29B.1
NetC27A_2: C27A.2 R29A.2 R32A.1
NetC27B_2: C27B.2 R29B.2 R32B.1
NetC28A_2: C28A.2 R32A.2 R73A.1
NetC28B_2: C28B.2 R32B.2 R73B.1
NetC30A_1: C30A.1 C31A.1 D3A.1 IC11A.1
NetC30A_2: C30A.2 R77A.1
NetC30B_1: C30B.1 C31B.1 D3B.1 IC11B.1
NetC30B_2: C30B.2 R77B.1
NetC31A_2: C31A.2 IC11A.2 R77A.2 R78A.1
NetC31B_2: C31B.2 IC11B.2 R77B.2 R78B.1
NetC32_1: C32.1 C37.2 IC16.22 L2.4
NetC32_2: C32.2 C33.1
NetC33_2: C33.2 C34.1 C38.2 IC16.14 IC17.22
NetC34_2: C34.2 C35.1
NetC37_1: C37.1 C40.1 IC16.2 IC16.23 L2.3
NetC38_1: C38.1 C41.2 C42.1 IC16.16 IC17.2 IC17.23
NetC40_2: C40.2 C41.1
NetC42_2: C42.2 C43.1
NetC44_1: C44.1 R57.2
NetC45A_2: C45A.2 IC11A.6 R87A.2 R91A.1
NetC45B_2: C45B.2 IC11B.6 R87B.2 R91B.1
NetC46_1: C46.1 R71.2
NetD1A_2: D1A.2 D9A.2
NetD1B_2: D1B.2 D9B.2
NetD3A_2: D3A.2 D8A.2 R74A.1 R76A.2
NetD3B_2: D3B.2 D8B.2 R74B.1 R76B.2
NetIC1_1: IC1.1 R1.1 T5.3
NetIC8_1: IC8.1 R23.1
NetIC8_3: IC8.3 IC28.3 R24.2
NetIC9A_5: IC9A.5 R74A.2
NetIC9B_5: IC9B.5 R74B.2
NetIC11A_3: IC11A.3 R82A.1
NetIC11A_5: IC11A.5 R58A.1
NetIC11B_3: IC11B.3 R82B.1
NetIC11B_5: IC11B.5 R58B.1
NetIC13A_1: IC13A.1 R49A.2 R85A.1
NetIC13A_2: IC13A.2 R63A.1 R85A.2
NetIC13A_3: IC13A.3 R89A.1 R92A.2
NetIC13A_5: IC13A.5 R49A.1 R90A.2
NetIC13A_6: IC13A.6 R86A.2 R88A.1
NetIC13A_7: IC13A.7 R62A.1 R91A.2 R94A.2
NetIC13B_1: IC13B.1 R49B.2 R85B.1
NetIC13B_2: IC13B.2 R63B.1 R85B.2
NetIC13B_3: IC13B.3 R89B.1 R92B.2
NetIC13B_5: IC13B.5 R49B.1 R90B.2
NetIC13B_6: IC13B.6 R86B.2 R88B.1
NetIC13B_7: IC13B.7 R62B.1 R91B.2 R94B.2
NetIC14A_1: IC14A.1 R26A.1 R79A.2 R88A.2
NetIC14A_2: IC14A.2 R26A.2 R30A.1
NetIC14A_3: IC14A.3 R80A.1 R83A.2
NetIC14A_5: IC14A.5 R79A.1
NetIC14A_6: IC14A.6 R28A.1 R33A.2
NetIC14A_7: IC14A.7 R33A.1 R78A.2 R84A.2
NetIC14B_1: IC14B.1 R26B.1 R79B.2 R88B.2
NetIC14B_2: IC14B.2 R26B.2 R30B.1
NetIC14B_3: IC14B.3 R80B.1 R83B.2
NetIC14B_5: IC14B.5 R79B.1
NetIC14B_6: IC14B.6 R28B.1 R33B.2
NetIC14B_7: IC14B.7 R33B.1 R78B.2 R84B.2
NetIC15A_22: IC15A.22 R27A.1
NetIC15A_25: IC15A.25 R25A.1
NetIC15B_22: IC15B.22 R27B.1
NetIC15B_25: IC15B.25 R25B.1
NetIC18_1: IC18.1 R67.2
NetIC18_2: IC18.2 R109.2
NetIC18_4: IC18.4 IC18.7 IC19.7 R56.1
NetIC18_5: IC18.5 IC18.9 R5.1 R108.2
NetIC18_6: IC18.6 IC18.10 R59.2 R108.1
NetIC18_8: IC18.8 IC18.11 IC19.1 R69.1
NetIC18_13: IC18.13 R72.2
NetIC18_14: IC18.14 R70.2
NetIC19_2: IC19.2 R69.2 R71.1
NetIC19_3: IC19.3 IC19.5 R66.1 R68.2
NetIC19_6: IC19.6 R56.2 R57.1
NetIC22A_4: IC22A.4 R76A.1
NetIC22B_4: IC22B.4 R76B.1
NetIC23_1: IC23.1 R6.1 T6.3
NetIC24_1: IC24.1 R98.1 T7.3
NetIC25_1: IC25.1 R102.1 T8.3
NetIC26_1: IC26.1 R106.1
NetIC26_3: IC26.3 IC28.1 R21.2
NetIC27_2: IC27.2 R106.2
NetIC27_4: IC27.4 IC27.5
NetIC27_6: IC27.6 R23.2
NetIC28_4: IC28.4 IC28.5
NetR2_1: R2.1 R3.2 T5.1
NetR4_2: R4.2 T5.2
NetR30A_2: R30A.2 R80A.2 R81A.1
NetR30B_2: R30B.2 R80B.2 R81B.1
NetR60A_1: R60A.1 R81A.2
NetR60A_2: R60A.2 R61A.1
NetR60B_1: R60B.1 R81B.2
NetR60B_2: R60B.2 R61B.1
NetR62A_2: R62A.2 R86A.1
NetR62B_2: R62B.2 R86B.1
NetR90A_1: R90A.1 R93A.2
NetR90B_1: R90B.1 R93B.2
NetR95_1: R95.1 R96.2 T6.1
NetR97_2: R97.2 T6.2
NetR99_1: R99.1 R100.2 T7.1
NetR101_2: R101.2 T7.2
NetR103_1: R103.1 R104.2 T8.1
NetR105_2: R105.2 T8.2
P3V3: C1.2 C6.2 C49.1 C61.2 C63.1 IC8.4 IC25.6 IC27.14 R1.2 R6.2 R98.2
P3V3Ap: C19A.2 C19B.2 C24A.2 C24B.2 C57.2 IC15A.38 IC15B.38 IC20.5 R75A.2 R75B.2
P3V3p: C2.1 C3.1 C7.1 C50.1 C62.2 IC1.6 IC23.6 IC24.6 IC26.4 IC28.14 R102.2 R107.2
P5V0: L1A.1 L1B.1
P5V0Ap: C21A.2 C21B.2 C22A.2 C22B.2 C29A.2 C29B.2 C47.2 C48A.2 C48B.2 C51.2 C52.2 C53.1 C54.2 C56.1 IC11A.8 IC11B.8 IC13A.8 IC13B.8 IC14A.8 IC14B.8 IC18.3 IC19.8 IC20.1 IC20.3 IC21.2 IC22A.5 IC22B.5 L3.2 LD1.2 LD2.2 LD3.2 LD4.2 R5.2 R66.2
P5V0p: C35.2 C39.2 IC17.14 L3.1
P12V0: C36.2 J1.6 J1.8 J1.10 L2.1
REFIN: C55.2 IC21.6 R20A.2 R20B.2 R22A.2 R22B.2
SCKI: J1.7 R95.2
SCKI_ISOL: IC15A.6 IC23.8
SDI: J1.1 R2.2
SDI_ISOL: IC1.8 IC15A.7
SDO: IC25.8 J1.3
SDO_ISOL: IC15A.5 R103.2
U_meas1: C16A.2 C44.2 IC15A.31 R84A.1
U_meas2: C16B.2 C46.2 IC15B.31 R84B.1
V1F: LD2.1 R67.1
V1R: LD1.1 R109.1
V2F: LD4.1 R72.1
V2R: LD3.1 R70.1
pads on no net: B1.1 B2.1 B3.1 B4.1 FTG1.FTG2 FTG2.1 FTG3.1 FTG4.1 IC1.9 IC1.10 IC1.11 IC1.12 IC1.13 IC1.14 IC15A.2 IC15A.3 IC15A.4 IC15A.10 IC15A.15 IC15A.16 IC15A.17 IC15A.20 IC15A.21 IC15A.27 IC15A.28 IC15A.29 IC15A.40 IC15B.2 IC15B.3 IC15B.4 IC15B.10 IC15B.15 IC15B.16 IC15B.17 IC15B.20 IC15B.21 IC15B.27 IC15B.28 IC15B.29 IC15B.40 IC16.11 IC17.11 IC20.4 IC21.1 IC21.3 IC21.5 IC21.7 IC21.8 IC23.9 IC23.10 IC23.11 IC23.12 IC23.13 IC23.14 IC24.9 IC24.10 IC24.11 IC24.12 IC24.13 IC24.14 IC25.9 IC25.10 IC25.11 IC25.12 IC25.13 IC25.14 IC27.8 IC27.9 IC27.10 IC27.11 IC27.12 IC27.13 IC28.8 IC28.9 IC28.10 IC28.11 IC28.12 IC28.13 J1.11 J1.12 J1.13 J1.M1 J1.M2 J1.M3 J1.M4 J1.M5 J1.M6 J1.M7 J1.M8 J1.M9 J1.M10 J1.M11 J1.M12 J1.M13 J1.M14 J1.M15 J1.M16

## Polygon pours and split planes (outlines as drawn)
GND on GP1(GND) (split plane): 124.49,7.51 7.51,7.51 7.51,13.49 17,13.49 17.1,13.499 17.195,13.528 17.284,13.576 17.361,13.639 17.424,13.716 17.472,13.805 17.501,13.9 17.51,14 17.51,86 17.501,86.1 17.472,86.195 17.424,86.284 17.361,86.361 17.284,86.424 17.195,86.472 17.1,86.501 17,86.51 7.51,86.51 7.51,92.49 124.49,92.49

## Other copper
GP1(GND) (plane layer: these items are gaps in the copper):
  rectangle: 82.174,12.776 91.389,16.114

## Silkscreen, mask and mechanical layers (free items; w line width, h text height)
Mechanical1:
  lines w0.15: 7,7 123,7 125,7 125,93 7,93 7,86 17,86 17,14 7,14 7,7.75 7,7
Mechanical4:
  lines w0.15: -5.044,-14.194 -5.044,114.162
  lines w0.3: 2.288,5.512 3.556,5.512 ; 3.545,7.074 3.556,7.063 3.556,5.512 ; 3.556,4.163 3.556,5.512 ; 5.412,5.512 3.556,5.512

## Text inside footprints (layer, text, board x,y; h text height)
IC9A: TopOverlay "5" at 56.497,80.905 h1 r270; TopOverlay "4" at 41.698,81.005 h1 r270; TopOverlay "3" at 41.698,85.705 h1 r270; TopOverlay "2" at 56.497,82.505 h1 r270; DrillDrawing "R 6" at 47.397,73.105 h1 r270; DrillDrawing "24" at 49.897,85.905 h1 r270; DrillDrawing "12" at 46.097,80.105 h1; DrillDrawing "R 1.1" at 45.698,89.805 h1 r270; Mechanical14 "5" at 56.497,80.905 h1 r270; Mechanical14 "4" at 41.698,81.005 h1 r270; Mechanical14 "3" at 41.698,85.705 h1 r270; Mechanical14 "2" at 56.497,82.505 h1 r270
IC9B: TopOverlay "5" at 56.498,48.305 h1 r270; TopOverlay "4" at 41.698,48.405 h1 r270; TopOverlay "3" at 41.698,53.105 h1 r270; TopOverlay "2" at 56.498,49.905 h1 r270; DrillDrawing "R 6" at 47.398,40.505 h1 r270; DrillDrawing "24" at 49.898,53.305 h1 r270; DrillDrawing "12" at 46.098,47.505 h1; DrillDrawing "R 1.1" at 45.698,57.205 h1 r270; Mechanical14 "5" at 56.498,48.305 h1 r270; Mechanical14 "4" at 41.698,48.405 h1 r270; Mechanical14 "3" at 41.698,53.105 h1 r270; Mechanical14 "2" at 56.498,49.905 h1 r270
IC16: TopOverlay "23" at 118.765,19.19 h1.2 r270; TopOverlay "14" at 95.905,19.19 h1.2 r270; TopOverlay "11" at 95.905,28.715 h1.2 r270
IC17: TopOverlay "23" at 86.265,19.19 h1.2 r270; TopOverlay "14" at 63.405,19.19 h1.2 r270; TopOverlay "11" at 63.405,28.715 h1.2 r270
J1: TopOverlay "16" at 122.364,51.204 h1 r270; TopOverlay "15" at 116.564,51.204 h1 r270; TopOverlay "2" at 122.364,67.504 h1 r270; TopOverlay "1" at 116.564,67.204 h1 r270